# Allegro board LAYOUT.brd
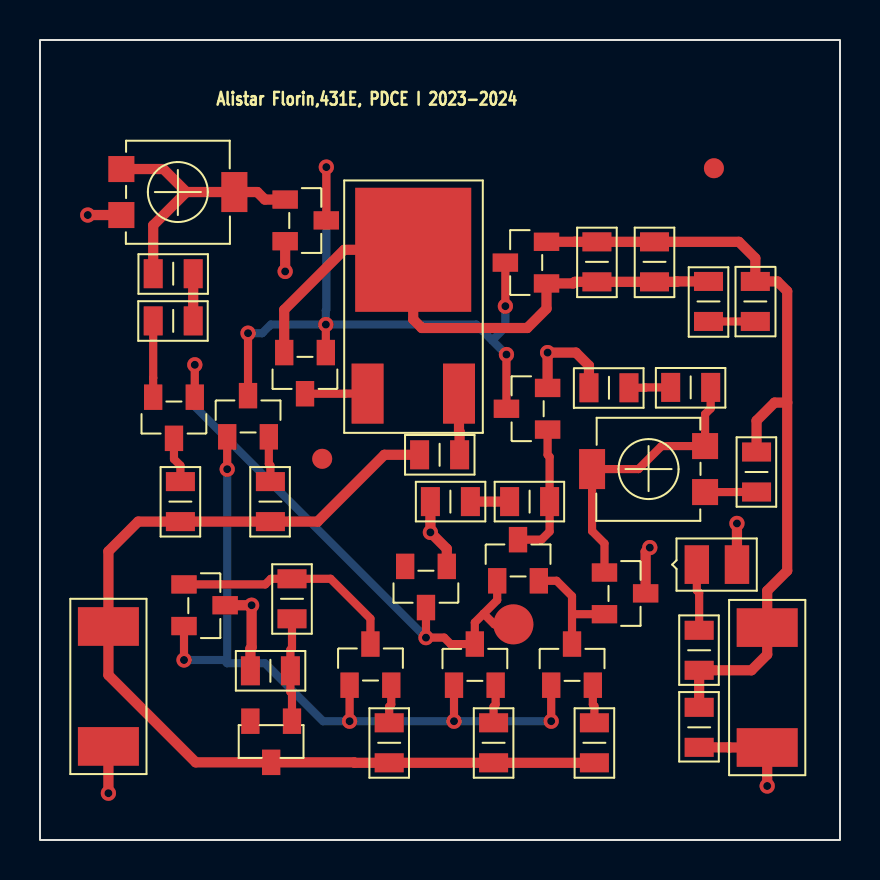
[diagram p0: board, top side]
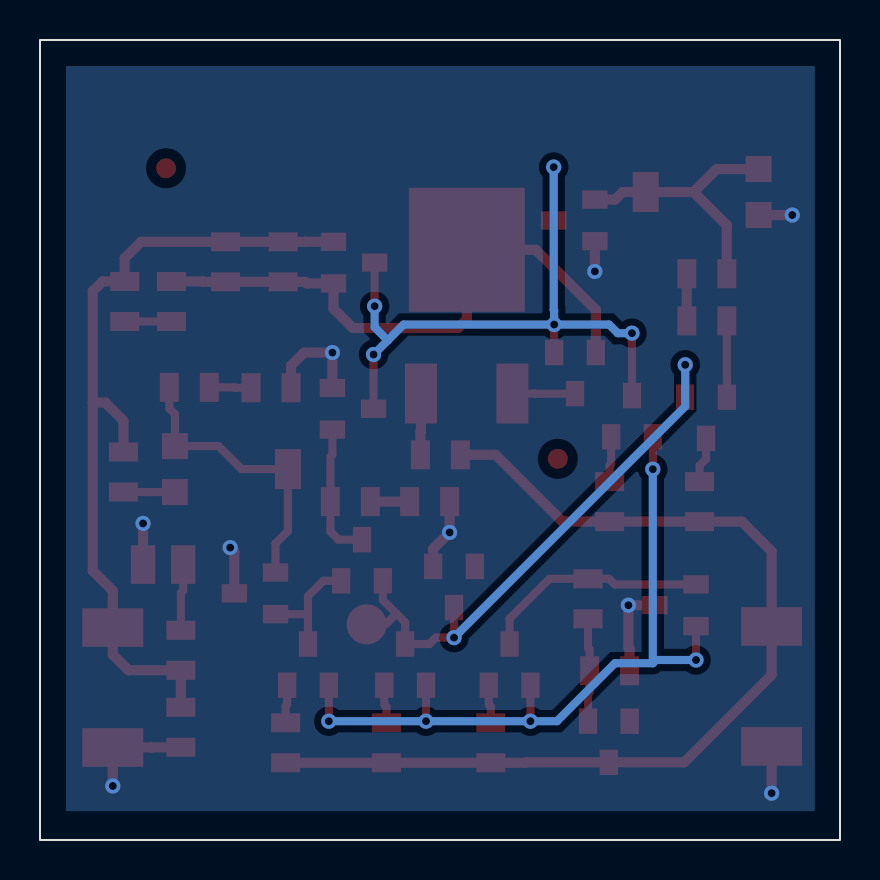
[diagram p1: board, bottom side, seen from below]

Outline 40 x 40 mm; copper layers: TOP, BOTTOM. Coordinates in mm from the lower left corner of the outline.
Outline path: rectangle 0,0 40,40

## Design rules (mm)
constraint set DEFAULT: min track width 0.508
nets with their own width: min track width 0.406; nets N02133 N02663 N03107 N03531 N14606 N14610 N18203 N18257 N20130 N20138 N24371 N54933 N69275 N72196 N73858 N77494 N78850 N85489 N128069
nets with their own width: min track width 0.508; nets N02102 N87486

## Placement (name value [footprint] x y rotation side)
D1  BZX84-C2V7  [TO236AA]  12.6 5.94 90 top
D2  BZX84-C2V7  [TO236AA]  20.34 13.68 90 top
IN  CON2  [SMR2512]  3.42 4.68 90 top
J1  CON1  [TP80]  23.67 10.78 0 top
LED  SMLS14BET  [SMD080521]  34.85 13.77 0 top
NOREF  -  [unnamed]  14.11 19.06 0 top
NOREF#2  -  [unnamed]  33.7 33.59 0 top
OUT  CON2  [SMR2512]  36.36 10.62 270 top
P1  5k  [TS53YL]  33.25 19.7 0 top
P2  10k  [TS53YL]  4.07 31.25 180 top
Q1  QMJD32CT4G  [DPACK]  16.38 22.32 0 top
Q2  QBC846B  [TO236AA]  14.29 24.37 90 top
Q3  QBC856B  [TO236AA]  15.48 7.74 270 top
Q4  QBC856B  [TO236AA]  20.7 7.74 270 top
Q5  QBC856B  [TO236AA]  25.56 7.74 270 top
Q6  QBC856B  [TO236AA]  9.36 20.16 270 top
Q7  QBC846B  [TO236AA]  25.33 27.83 0 top
Q8  QBC856B  [TO236AA]  22.86 12.96 270 top
Q9  QBC856B  [TO236AA]  28.22 13.37 180 top
Q10  QBC846B  [TO236AA]  25.38 20.52 0 top
Q11  QBC856B  [TO236AA]  7.2 12.78 180 top
Q12  QBC846B  [TO236AA]  12.26 32.02 180 top
Q13  QBC846B  [TO236AA]  7.74 22.14 90 top
R0  680  [RES2012X50N_0805]  11.52 8.46 0 top
R1  1k  [RES2012X50N_0805]  12.6 12.06 90 top
R2  1  [RES2012X50N_0805]  19.98 19.26 180 top
R3  510  [RES2012X50N_0805]  17.46 4.86 270 top
R4  68  [RES2012X50N_0805]  22.68 4.86 270 top
R5  82  [RES2012X50N_0805]  27.72 4.86 270 top
R6  470  [RES2012X50N_0805]  11.52 16.92 270 top
R7  1k  [RES2012X50N_0805]  7.02 16.92 270 top
R8  220  [RES2012X50N_0805]  24.48 16.92 0 top
R9  51  [RES2012X50N_0805]  20.52 16.92 0 top
R10  910  [RES2012X50N_0805]  35.83 18.4 90 top
R11  4k7  [RES2012X50N_0805]  32.53 22.63 0 top
R12  150  [RES2012X50N_0805]  28.45 22.61 0 top
R13  15k  [RES2012X50N_0805]  6.66 25.96 180 top
R14  1k  [RES2012X50N_0805]  6.66 28.31 0 top
RL  100  [RES2012X50N_0805]  32.96 5.63 90 top
RLED  100  [RES2012X50N_0805]  32.96 9.49 270 top
RSC1  4.7  [RES2012X50N_0805]  35.77 26.93 270 top
RSC2  4.7  [RES2012X50N_0805]  30.73 28.91 270 top
RSC3  4.7  [RES2012X50N_0805]  27.85 28.91 270 top
RSC4  1  [RES2012X50N_0805]  33.43 26.93 90 top

## Library data of the parts
D1 D2 = BZX84-C2V7_2
IN OUT = CON2
J1 = CON1
LED = SMLS14BET_1
P1 P2 = POT
Q1 = QMJD32CT4G_0
Q2 Q7 Q10 Q12 Q13 = QBC846B_1
Q3-Q6 Q8 Q9 Q11 = QBC856B_3
R0-R14 RL RLED RSC1-RSC4 = R

## Footprints (pads in the part's own frame, mm; a bottom-side part is the same pattern mirrored in y, then rotated)
DPACK
  rect 1.6x3 smd: 1(0,0) 3(4.57,0)
  rect 5.8x6.2 smd: 2(2.28,7.19)
RES2012X50N_0805
  rect 0.95x1.45 smd: 1(-1,0) 2(1,0)
SMD080521
  rect 1.219x1.93 smd: 1(0,0) 2(-2.007,0)
SMR2512
  rect 1.93x3.048 smd: 1(0,0) 2(5.994,0)
TO236AA
  rect 1.27x0.914 smd: 1(0,0) 2(0,2.083) 3(-2.057,1.041)
TP80
  round 2 smd: 1(0,0)
TS53YL
  rect 1.3x1.3 smd: 1(0,0) 3(0,-2.3)
  rect 1.3x2 smd: 2(-5.65,-1.15)
unnamed
  round 1 smd: (0,0)

## Nets
GND: D2.1 IN.1 LED.1(C) OUT.2 P2.1 Q9.3 Q10.2(E) Q11.3 Q12.2(E) R0.1 R9.1 R12.1 RL.1
VIN: D1.3 IN.2 R2.2 R3.2 R4.2 R5.2 R6.2 R7.2
VOUT: OUT.1 Q7.2(E) R10.2 RL.2 RLED.2 RSC1.1 RSC2.1 RSC3.1
N02102: Q1.2 Q2.2(E) Q7.1 RSC2.2 RSC3.2 RSC4.2
N02133: Q2.1 Q6.3 Q7.3 Q10.3 Q12.3
N02663: Q5.3 Q8.2(E) Q9.2(E)
N03107: D2.3 J1.1 Q4.3 Q8.1 Q13.1
N03531: Q8.3 Q10.1 R8.2
N14606: Q4.2(E) R4.1
N14610: Q5.2(E) R5.1
N18203: Q3.1 Q4.1 Q5.1 Q6.1 Q11.2(E)
N18257: Q3.2(E) R3.1
N20130: D1.1 R0.2 R1.1
N20138: Q3.3 Q11.1 R1.2
N24371: Q6.2(E) R6.1
N54933: P1.1 P1.2(T) Q9.1 R11.2
N56900: P2.2(T) P2.3 Q12.1 R14.1
N69275: P1.3 R10.1
N72196: R11.1 R12.2
N73858: Q1.1 Q2.3
N77494: LED.2 RLED.1
N78850: Q13.3 R7.1
N85489: RSC1.2 RSC4.1
N87486: Q1.3(E) R2.1
N128069: Q13.2(E) R13.2
N128107: R13.1 R14.2
N128345: R8.1 R9.2

Pads without a net: D1 2; D2 2

## Via types
v1: diameter 0.762, hole 0.4, TOP to BOTTOM, 21 vias

## Routing (per net, layer and track width the routed paths; a pad name or vN(x,y) marks a point on that pad's centre or on a via; arc(x,y) is an arc through that point)
GND: length 28.7
  TOP w0.508: LED.1 v1(34.85,15.83) ; IN.1 v1(3.42,2.34) ; Q9.3 30.28,14.41 v1(30.49,14.62) ; R0.1 10.52,9.57 10.58,9.63 v1(10.58,11.74) Q11.3 ; R9.1 v1(19.52,15.38) 20.34,14.56 D2.1 ; P2.1 v1(2.39,31.25) ; v1(36.36,2.7) OUT.2 34.45,4.63 34.45,4.63 RL.1 ; R12.1 27.45,23.72 26.8,24.37 v1(25.38,24.37) Q10.2 ; Q12.2 v1(12.26,28.43)
VIN: length 49.9
  TOP w0.508: R5.2 R4.2 R3.2 15.73,3.86 15.7,3.88 D1.3 7.79,3.88 3.42,8.25 IN.2 3.42,14.43 4.91,15.92 R7.2 R6.2 13.88,15.92 17.22,19.26 R2.2
VOUT: length 41.4
  TOP w0.508: 37.36,21.87 36.73,21.87 35.83,20.97 R10.2 ; 37.36,21.87 37.36,27.44 36.87,27.93 RSC1.1 35.77,29.09 34.95,29.91 RSC2.1 RSC3.1 26.74,29.91 26.74,29.91 Q7.2 ; 37.36,21.87 37.36,13.46 36.36,12.46 OUT.1 36.36,9.27 35.57,8.49 RLED.2 RL.2
N02102: length 30
  TOP w0.508: RSC4.2 31.85,27.93 31.83,27.91 RSC2.2 RSC3.2 26.74,27.91 26.66,27.83 Q7.1 25.33,26.56 24.36,25.6 19.09,25.6 18.66,26.03 Q1.2 15.21,29.51 12.21,26.51 Q2.2
N02133: length 35.7
  TOP w0.406: Q6.3 v1(10.4,25.34) ; Q7.3 v1(23.27,26.69) ; Q12.3 v1(14.32,33.65) ; Q10.3 v1(23.32,24.27) ; Q2.1 v1(14.29,25.77)
  BOTTOM w0.406: v1(14.29,25.77) 21.82,25.77 22.61,24.98 ; v1(14.29,25.77) 11.54,25.77 11.11,25.34 v1(10.4,25.34) ; v1(14.29,25.77) 14.29,26.48 14.32,26.51 v1(14.32,33.65) ; 22.61,24.98 23.27,25.64 v1(23.27,26.69) ; 22.61,24.98 23.3,24.3 ; v1(23.32,24.27) 23.32,24.27 23.3,24.3 ; 23.3,24.3 23.32,24.3
N02663: length 6
  TOP w0.406: 26.6,11.18 26.6,12.19 25.83,12.96 Q8.2 ; 26.6,11.18 26.71,11.29 Q9.2 ; 26.6,11.18 Q5.3
N03107: length 29.5
  TOP w0.406: D2.3 v1(19.3,10.12) 20.21,10.12 20.53,9.8 Q4.3 21.74,10.88 22.18,11.32 ; 22.18,11.32 22.86,11.99 Q8.1 ; 22.18,11.32 22.72,10.78 J1.1 ; Q13.1 v1(7.74,23.76)
  BOTTOM w0.406: v1(7.74,23.76) 7.74,21.68 v1(19.3,10.12)
N03531: length 6.9
  TOP w0.406: Q10.1 25.38,19.26 25.48,19.16 R8.2 25.48,15.42 25.07,15.02 Q8.3
N14606: length 1.9
  TOP w0.406: Q4.2 22.78,6.77 22.68,6.67 R4.1
N14610: length 1.9
  TOP w0.406: R5.1 27.72,6.7 27.64,6.77 Q5.2
N18203: length 38
  TOP w0.406: Q6.1 v1(9.36,18.54) ; Q4.1 v1(20.7,5.94) ; v1(15.48,5.94) Q3.1 ; Q11.2 v1(7.2,9) ; Q5.1 v1(25.56,5.94)
  BOTTOM w0.406: v1(25.56,5.94) v1(20.7,5.94) v1(15.48,5.94) 14.15,5.94 11.25,8.84 9.36,8.84 ; 9.36,8.84 v1(9.36,18.54) ; 9.36,8.84 9.2,9 v1(7.2,9)
N18257: length 1.9
  TOP w0.406: R3.1 17.46,6.67 17.56,6.77 Q3.2
N20130: length 5.2
  TOP w0.406: D1.1 12.6,7.32 12.52,7.4 R0.2 12.52,9.52 12.6,9.6 R1.1
N20138: length 11.5
  TOP w0.406: Q11.1 11.26,12.78 11.54,13.06 R1.2 14.53,13.06 16.52,11.07 Q3.3
N24371: length 2.3
  TOP w0.406: Q6.2 11.44,18.8 11.52,18.73 R6.1
N54933: length 14.6
  TOP w0.406: R11.2 33.53,21.57 33.25,21.29 P1.1 31.08,19.7 29.93,18.55 P1.2 27.6,15.45 28.22,14.83 Q9.1
N56900: length 13.6
  TOP w0.508: 7.32,32.4 5.66,30.74 R14.1 ; 7.32,32.4 P2.2 10.87,32.4 11.24,32.02 Q12.1 ; 7.32,32.4 6.17,33.55 P2.3
N69275: length 2.6
  TOP w0.406: R10.1 34.77,17.4 34.77,17.4 P1.3
N72196: length 2.1
  TOP w0.406: R12.2 30.25,22.61 30.27,22.63 R11.1
N73858: length 3.1
  TOP w0.406: Q1.1 15.25,22.32 15.25,22.31 Q2.3
N77494: length 3.3
  TOP w0.406: LED.2 32.84,12.47 32.96,12.36 RLED.1
N78850: length 2.3
  TOP w0.406: R7.1 7.02,18.73 6.7,19.05 Q13.3
N85489: length 2.3
  TOP w0.406: RSC4.1 RSC1.2
N87486: length 3.1
  TOP w0.508: R2.1 20.98,20.41 20.95,20.44 Q1.3
N128069: length 3.8
  TOP w0.406: R13.2 5.66,23.11 5.66,23.11 Q13.2
N128107: length 2.4
  TOP w0.508: R14.2 R13.1
N128345: length 2
  TOP w0.508: R9.2 R8.1

## Copper pours and planes (outline as drawn; the poured copper is in the pictures)
GND on BOTTOM: 1.26,38.7 1.26,1.44 38.7,1.44 38.7,38.7

## Text on the board
Ref Des/Silkscreen Top: Alistar Florin,431E, PDCE I 2023-2024
XSECTION_CHART: *  SURFACE - AIR 0 MM(+0/-0) | L1 TOP CONDUCTOR - COPPER 0.035 MM(+0/-0) | *  DIELECTRIC - FR-4 1.53 MM(+0/-0) | L2 BOTTOM CONDUCTOR - COPPER 0.035 MM(+0/-0) | DESIGN CROSS SECTION CHART | ___________________________ | TOTAL THICKNESS 1.6 MM | 1-2
DISPLAY_TOP: FIGURE | FINISHED_SIZE | 0.4 | DRILL CHART: TOP to BOTTOM | ALL UNITS ARE IN MILLIMETERS | PLATED | QTY | 21
